# Allegro board motherboard.brd
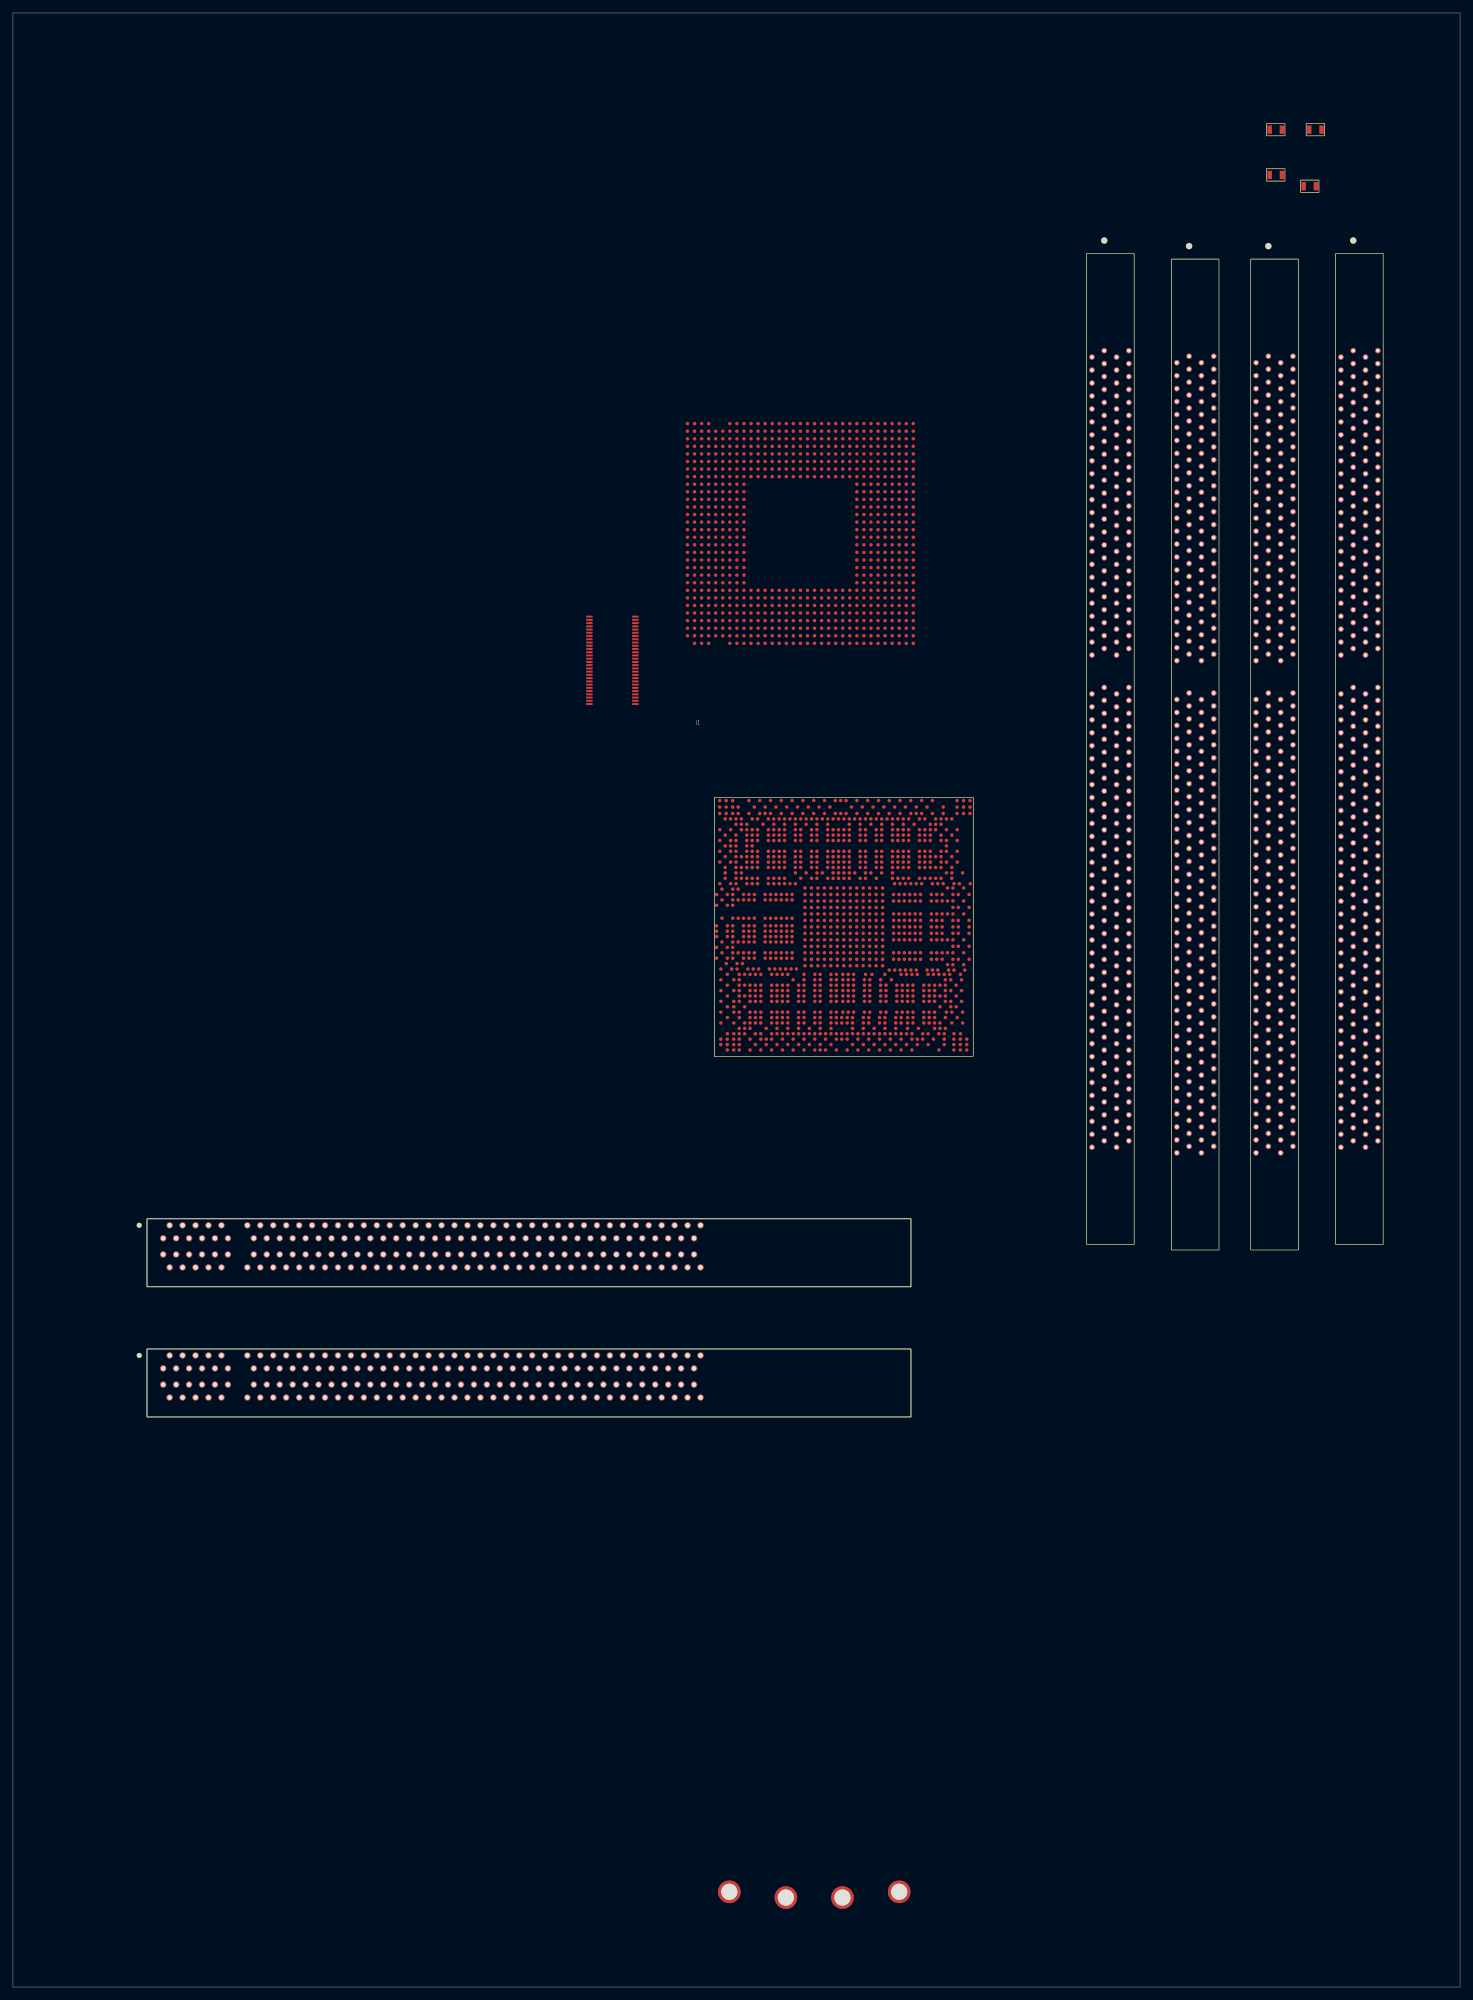
[diagram p0: board, top side]
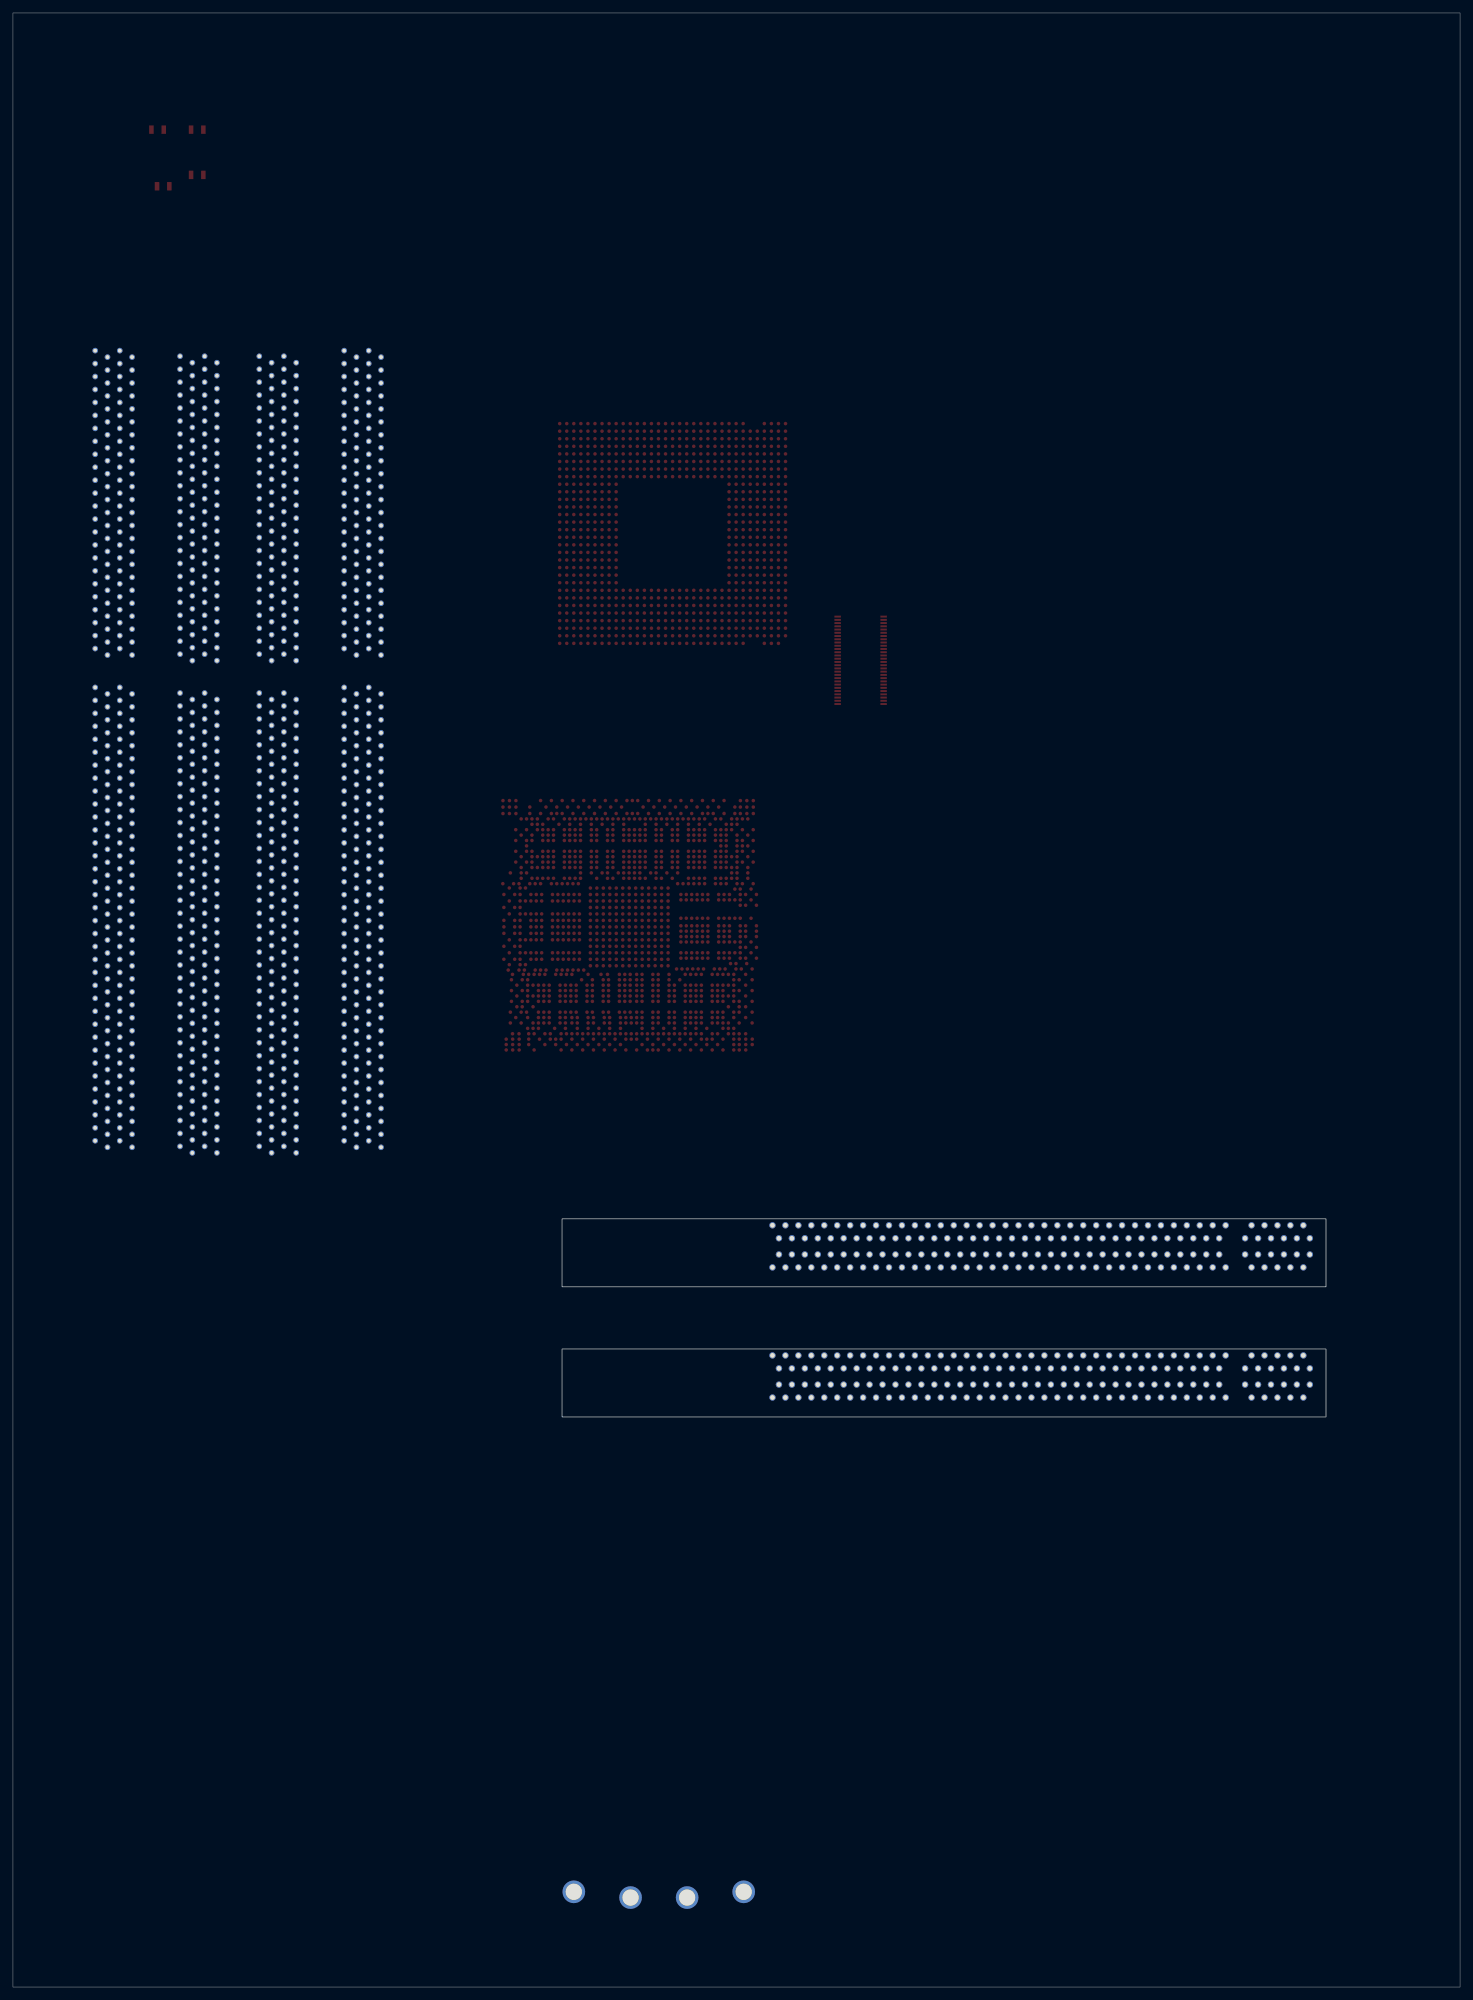
[diagram p1: board, bottom side, seen from below]

Outline 223.52 x 304.8 mm; copper layers: TOP, BOTTOM. Coordinates in mm from the lower left corner of the outline.
Outline path: 0,304.8 223.52,304.8 223.52,0 0,0 0,304.8

## Placement (name value [footprint] x y rotation side)
J1  Socket 775  [INTEL_SOCKET_775_REV2]  104.19 207.47 0 top
J2  DDR3 Socket  [MOLEX_DDR3_SOCKET_78315-0201]  -1.98 408.66 270 top
J3  DDR3 Socket  [MOLEX_DDR3_SOCKET_78315-0201]  -15.09 407.8 270 top
J4  DDR3 Socket  [MOLEX_DDR3_SOCKET_78315-0201]  -27.33 407.8 270 top
J5  DDR3 Socket  [MOLEX_DDR3_SOCKET_78315-0201]  -40.44 408.66 270 top
J6  PCI Express x16 Socket  [MOLEX_PCI-E_X16_SOCKET_47505]  -118.8 -119.89 0 top
J7  PCI Express x16 Socket  [MOLEX_PCI-E_X16_SOCKET_47505]  -118.8 -139.98 0 top
R1  R_0805  [0805_SMD]  184.61 260.78 0 top
R2  R_0805  [0805_SMD]  184.61 253.8 0 top
R3  R_0805  [0805_SMD]  190.73 260.78 0 top
R4  R_0805  [0805_SMD]  189.87 252.04 0 top
TP1  X48 TP3  [TEST_POINT]  57.89 -9.3 0 top
TP2  X48 TP2  [TEST_POINT]  49.12 -10.19 0 top
TP3  X48 TP1  [TEST_POINT]  40.39 -10.19 0 top
TP4  X48 TP0  [TEST_POINT]  31.65 -9.3 0 top
U1  X48 Express  [INTEL_X48]  108.33 143.69 0 top
U2  Clock CK505  [TSSOP_56]  -119.96 23.6 0 top

## Library data of the parts
J1 = Socket 775
J2-J5 = DDR3 Socket
J6 J7 = PCI Express x16 Slot
R1-R4 = R_0805
TP1-TP4 = TEST POINT
U1 = X48 Express Northbridge
U2 = Clock CK505

## Footprints (pads in the part's own frame, mm; a bottom-side part is the same pattern mirrored in y, then rotated)
0805_SMD
  rect 0.7x1.3 smd: 1(11.4,26) 2(9.5,26)
INTEL_SOCKET_775_REV2
  round 0.55 smd: A2(0,1.17) A3(0,2.34) A4(0,3.51) A5(0,4.68) A6(0,5.85) A7(0,7.02) A8(0,8.19) A9(0,9.36) A10(0,10.53) A11(0,11.7) A12(0,12.87) A13(0,14.04) A14(0,15.21) A15(0,16.38) A16(0,17.55) A17(0,18.72) A18(0,19.89) A19(0,21.06) A20(0,22.23) A21(0,23.4) A22(0,24.57) A23(0,25.74) A24(0,26.91) A25(0,28.08) A26(0,29.25) A27(0,30.42) A28(0,31.59) A29(0,32.76) A30(0,33.93) AA1(21.8,0) AA2(21.8,1.17) AA3(21.8,2.34) AA4(21.8,3.51) AA5(21.8,4.68) AA6(21.8,5.85) AA7(21.8,7.02) AA8(21.8,8.19) AA23(21.8,25.74) AA24(21.8,26.91) AA25(21.8,28.08) AA26(21.8,29.25) AA27(21.8,30.42) AA28(21.8,31.59) AA29(21.8,32.76) AA30(21.8,33.93) AB1(22.89,0) AB2(22.89,1.17) AB3(22.89,2.34) AB4(22.89,3.51) AB5(22.89,4.68) AB6(22.89,5.85) AB7(22.89,7.02) AB8(22.89,8.19) AB23(22.89,25.74) AB24(22.89,26.91) AB25(22.89,28.08) AB26(22.89,29.25) AB27(22.89,30.42) AB28(22.89,31.59) AB29(22.89,32.76) AB30(22.89,33.93) AC1(23.98,0) AC2(23.98,1.17) AC3(23.98,2.34) AC4(23.98,3.51) AC5(23.98,4.68) AC6(23.98,5.85) AC7(23.98,7.02) AC8(23.98,8.19) AC23(23.98,25.74) AC24(23.98,26.91) AC25(23.98,28.08) AC26(23.98,29.25) AC27(23.98,30.42) AC28(23.98,31.59) AC29(23.98,32.76) AC30(23.98,33.93) AD1(25.07,0) AD2(25.07,1.17) AD3(25.07,2.34) AD4(25.07,3.51) AD5(25.07,4.68) AD6(25.07,5.85) AD7(25.07,7.02) AD8(25.07,8.19) AD23(25.07,25.74) AD24(25.07,26.91) AD25(25.07,28.08) AD26(25.07,29.25) AD27(25.07,30.42) AD28(25.07,31.59) AD29(25.07,32.76) AD30(25.07,33.93) AE1(26.16,0) AE2(26.16,1.17) AE3(26.16,2.34) AE4(26.16,3.51) AE5(26.16,4.68) AE6(26.16,5.85) AE7(26.16,7.02) AE8(26.16,8.19) AE9(26.16,9.36) AE10(26.16,10.53) AE11(26.16,11.7) AE12(26.16,12.87) AE13(26.16,14.04) AE14(26.16,15.21) AE15(26.16,16.38) AE16(26.16,17.55) AE17(26.16,18.72) AE18(26.16,19.89) AE19(26.16,21.06) AE20(26.16,22.23) AE21(26.16,23.4) AE22(26.16,24.57) AE23(26.16,25.74) AE24(26.16,26.91) AE25(26.16,28.08) AE26(26.16,29.25) AE27(26.16,30.42) AE28(26.16,31.59) AE29(26.16,32.76) AE30(26.16,33.93) AF1(27.25,0) AF2(27.25,1.17) AF3(27.25,2.34) AF4(27.25,3.51) AF5(27.25,4.68) AF6(27.25,5.85) AF7(27.25,7.02) AF8(27.25,8.19) AF9(27.25,9.36) AF10(27.25,10.53) AF11(27.25,11.7) AF12(27.25,12.87) AF13(27.25,14.04) AF14(27.25,15.21) AF15(27.25,16.38) AF16(27.25,17.55) AF17(27.25,18.72) AF18(27.25,19.89) AF19(27.25,21.06) AF20(27.25,22.23) AF21(27.25,23.4) AF22(27.25,24.57) AF23(27.25,25.74) AF24(27.25,26.91) AF25(27.25,28.08) AF26(27.25,29.25) AF27(27.25,30.42) AF28(27.25,31.59) AF29(27.25,32.76) AF30(27.25,33.93) AG1(28.34,0) AG2(28.34,1.17) AG3(28.34,2.34) AG4(28.34,3.51) AG5(28.34,4.68) AG6(28.34,5.85) AG7(28.34,7.02) AG8(28.34,8.19) AG9(28.34,9.36) AG10(28.34,10.53) AG11(28.34,11.7) AG12(28.34,12.87) AG13(28.34,14.04) AG14(28.34,15.21) AG15(28.34,16.38) AG16(28.34,17.55) AG17(28.34,18.72) AG18(28.34,19.89) AG19(28.34,21.06) AG20(28.34,22.23) AG21(28.34,23.4) AG22(28.34,24.57) AG23(28.34,25.74) AG24(28.34,26.91) AG25(28.34,28.08) AG26(28.34,29.25) AG27(28.34,30.42) AG28(28.34,31.59) AG29(28.34,32.76) AG30(28.34,33.93) AH1(29.43,0) AH2(29.43,1.17) AH3(29.43,2.34) AH4(29.43,3.51) AH5(29.43,4.68) AH6(29.43,5.85) AH7(29.43,7.02) AH8(29.43,8.19) AH9(29.43,9.36) AH10(29.43,10.53) AH11(29.43,11.7) AH12(29.43,12.87) AH13(29.43,14.04) AH14(29.43,15.21) AH15(29.43,16.38) AH16(29.43,17.55) AH17(29.43,18.72) AH18(29.43,19.89) AH19(29.43,21.06) AH20(29.43,22.23) AH21(29.43,23.4) AH22(29.43,24.57) AH23(29.43,25.74) AH24(29.43,26.91) AH25(29.43,28.08) AH26(29.43,29.25) AH27(29.43,30.42) AH28(29.43,31.59) AH29(29.43,32.76) AH30(29.43,33.93) AJ1(30.52,0) AJ2(30.52,1.17) AJ3(30.52,2.34) AJ4(30.52,3.51) AJ5(30.52,4.68) AJ6(30.52,5.85) AJ7(30.52,7.02) AJ8(30.52,8.19) AJ9(30.52,9.36) AJ10(30.52,10.53) AJ11(30.52,11.7) AJ12(30.52,12.87) AJ13(30.52,14.04) AJ14(30.52,15.21) AJ15(30.52,16.38) AJ16(30.52,17.55) AJ17(30.52,18.72) AJ18(30.52,19.89) AJ19(30.52,21.06) AJ20(30.52,22.23) AJ21(30.52,23.4) AJ22(30.52,24.57) AJ23(30.52,25.74) AJ24(30.52,26.91) AJ25(30.52,28.08) AJ26(30.52,29.25) AJ27(30.52,30.42) AJ28(30.52,31.59) AJ29(30.52,32.76) AJ30(30.52,33.93) AK1(31.61,0) AK2(31.61,1.17) AK3(31.61,2.34) AK4(31.61,3.51) AK5(31.61,4.68) AK6(31.61,5.85) AK7(31.61,7.02) AK8(31.61,8.19) AK9(31.61,9.36) AK10(31.61,10.53) AK11(31.61,11.7) AK12(31.61,12.87) AK13(31.61,14.04) AK14(31.61,15.21) AK15(31.61,16.38) AK16(31.61,17.55) AK17(31.61,18.72) AK18(31.61,19.89) AK19(31.61,21.06) AK20(31.61,22.23) AK21(31.61,23.4) AK22(31.61,24.57) AK23(31.61,25.74) AK24(31.61,26.91) AK25(31.61,28.08) AK26(31.61,29.25) AK27(31.61,30.42) AK28(31.61,31.59) AK29(31.61,32.76) AK30(31.61,33.93) AL1(32.7,0) AL2(32.7,1.17) AL3(32.7,2.34) AL4(32.7,3.51) AL5(32.7,4.68) AL6(32.7,5.85) AL7(32.7,7.02) AL8(32.7,8.19) AL9(32.7,9.36) AL10(32.7,10.53) AL11(32.7,11.7) AL12(32.7,12.87) AL13(32.7,14.04) AL14(32.7,15.21) AL15(32.7,16.38) AL16(32.7,17.55) AL17(32.7,18.72) AL18(32.7,19.89) AL19(32.7,21.06) AL20(32.7,22.23) AL21(32.7,23.4) AL22(32.7,24.57) AL23(32.7,25.74) AL24(32.7,26.91) AL25(32.7,28.08) AL26(32.7,29.25) AL27(32.7,30.42) AL28(32.7,31.59) AL29(32.7,32.76) AL30(32.7,33.93) AM1(33.79,0) AM2(33.79,1.17) AM3(33.79,2.34) AM4(33.79,3.51) AM5(33.79,4.68) AM6(33.79,5.85) AM7(33.79,7.02) AM8(33.79,8.19) AM9(33.79,9.36) AM10(33.79,10.53) AM11(33.79,11.7) AM12(33.79,12.87) AM13(33.79,14.04) AM14(33.79,15.21) AM15(33.79,16.38) AM16(33.79,17.55) AM17(33.79,18.72) AM18(33.79,19.89) AM19(33.79,21.06) AM20(33.79,22.23) AM21(33.79,23.4) AM22(33.79,24.57) AM23(33.79,25.74) AM24(33.79,26.91) AM25(33.79,28.08) AM26(33.79,29.25) AM27(33.79,30.42) AM28(33.79,31.59) AM29(33.79,32.76) AM30(33.79,33.93) AN1(34.88,0) AN2(34.88,1.17) AN3(34.88,2.34) AN4(34.88,3.51) AN5(34.88,4.68) AN6(34.88,5.85) AN7(34.88,7.02) AN8(34.88,8.19) AN9(34.88,9.36) AN10(34.88,10.53) AN11(34.88,11.7) AN12(34.88,12.87) AN13(34.88,14.04) AN14(34.88,15.21) AN15(34.88,16.38) AN16(34.88,17.55) AN17(34.88,18.72) AN18(34.88,19.89) AN19(34.88,21.06) AN20(34.88,22.23) AN21(34.88,23.4) AN22(34.88,24.57) AN23(34.88,25.74) AN24(34.88,26.91) AN25(34.88,28.08) AN26(34.88,29.25) AN27(34.88,30.42) AN28(34.88,31.59) AN29(34.88,32.76) AN30(34.88,33.93) B1(1.09,0) B2(1.09,1.17) B3(1.09,2.34) B4(1.09,3.51) B5(1.09,4.68) B6(1.09,5.85) B7(1.09,7.02) B8(1.09,8.19) B9(1.09,9.36) B10(1.09,10.53) B11(1.09,11.7) B12(1.09,12.87) B13(1.09,14.04) B14(1.09,15.21) B15(1.09,16.38) B16(1.09,17.55) B17(1.09,18.72) B18(1.09,19.89) B19(1.09,21.06) B20(1.09,22.23) B21(1.09,23.4) B22(1.09,24.57) B23(1.09,25.74) B24(1.09,26.91) B25(1.09,28.08) B26(1.09,29.25) B27(1.09,30.42) B28(1.09,31.59) B29(1.09,32.76) B30(1.09,33.93) C1(2.18,0) C2(2.18,1.17) C3(2.18,2.34) C4(2.18,3.51) C5(2.18,4.68) C6(2.18,5.85) C7(2.18,7.02) C8(2.18,8.19) C9(2.18,9.36) C10(2.18,10.53) C11(2.18,11.7) C12(2.18,12.87) C13(2.18,14.04) C14(2.18,15.21) C15(2.18,16.38) C16(2.18,17.55) C17(2.18,18.72) C18(2.18,19.89) C19(2.18,21.06) C20(2.18,22.23) C21(2.18,23.4) C22(2.18,24.57) C23(2.18,25.74) C24(2.18,26.91) C25(2.18,28.08) C26(2.18,29.25) C27(2.18,30.42) C28(2.18,31.59) C29(2.18,32.76) C30(2.18,33.93) D1(3.27,0) D2(3.27,1.17) D3(3.27,2.34) D4(3.27,3.51) D5(3.27,4.68) D6(3.27,5.85) D7(3.27,7.02) D8(3.27,8.19) D9(3.27,9.36) D10(3.27,10.53) D11(3.27,11.7) D12(3.27,12.87) D13(3.27,14.04) D14(3.27,15.21) D15(3.27,16.38) D16(3.27,17.55) D17(3.27,18.72) D18(3.27,19.89) D19(3.27,21.06) D20(3.27,22.23) D21(3.27,23.4) D22(3.27,24.57) D23(3.27,25.74) D24(3.27,26.91) D25(3.27,28.08) D26(3.27,29.25) D27(3.27,30.42) D28(3.27,31.59) D29(3.27,32.76) D30(3.27,33.93) E2(4.36,1.17) E3(4.36,2.34) E4(4.36,3.51) E5(4.36,4.68) E6(4.36,5.85) E7(4.36,7.02) E8(4.36,8.19) E9(4.36,9.36) E10(4.36,10.53) E11(4.36,11.7) E12(4.36,12.87) E13(4.36,14.04) E14(4.36,15.21) E15(4.36,16.38) E16(4.36,17.55) E17(4.36,18.72) E18(4.36,19.89) E19(4.36,21.06) E20(4.36,22.23) E21(4.36,23.4) E22(4.36,24.57) E23(4.36,25.74) E24(4.36,26.91) E25(4.36,28.08) E26(4.36,29.25) E27(4.36,30.42) E28(4.36,31.59) E29(4.36,32.76) F2(5.45,1.17) F3(5.45,2.34) F4(5.45,3.51) F5(5.45,4.68) F6(5.45,5.85) F7(5.45,7.02) F8(5.45,8.19) F9(5.45,9.36) F10(5.45,10.53) F11(5.45,11.7) F12(5.45,12.87) F13(5.45,14.04) F14(5.45,15.21) F15(5.45,16.38) F16(5.45,17.55) F17(5.45,18.72) F18(5.45,19.89) F19(5.45,21.06) F20(5.45,22.23) F21(5.45,23.4) F22(5.45,24.57) F23(5.45,25.74) F24(5.45,26.91) F25(5.45,28.08) F26(5.45,29.25) F27(5.45,30.42) F28(5.45,31.59) F29(5.45,32.76) G1(6.54,0) G2(6.54,1.17) G3(6.54,2.34) G4(6.54,3.51) G5(6.54,4.68) G6(6.54,5.85) G7(6.54,7.02) G8(6.54,8.19) G9(6.54,9.36) G10(6.54,10.53) G11(6.54,11.7) G12(6.54,12.87) G13(6.54,14.04) G14(6.54,15.21) G15(6.54,16.38) G16(6.54,17.55) G17(6.54,18.72) G18(6.54,19.89) G19(6.54,21.06) G20(6.54,22.23) G21(6.54,23.4) G22(6.54,24.57) G23(6.54,25.74) G24(6.54,26.91) G25(6.54,28.08) G26(6.54,29.25) G27(6.54,30.42) G28(6.54,31.59) G29(6.54,32.76) G30(6.54,33.93) H1(7.63,0) H2(7.63,1.17) H3(7.63,2.34) H4(7.63,3.51) H5(7.63,4.68) H6(7.63,5.85) H7(7.63,7.02) H8(7.63,8.19) H9(7.63,9.36) H10(7.63,10.53) H11(7.63,11.7) H12(7.63,12.87) H13(7.63,14.04) H14(7.63,15.21) H15(7.63,16.38) H16(7.63,17.55) H17(7.63,18.72) H18(7.63,19.89) H19(7.63,21.06) H20(7.63,22.23) H21(7.63,23.4) H22(7.63,24.57) H23(7.63,25.74) H24(7.63,26.91) H25(7.63,28.08) H26(7.63,29.25) H27(7.63,30.42) H28(7.63,31.59) H29(7.63,32.76) H30(7.63,33.93) J1(8.72,0) J2(8.72,1.17) J3(8.72,2.34) J4(8.72,3.51) J5(8.72,4.68) J6(8.72,5.85) J7(8.72,7.02) J8(8.72,8.19) J9(8.72,9.36) J10(8.72,10.53) J11(8.72,11.7) J12(8.72,12.87) J13(8.72,14.04) J14(8.72,15.21) J15(8.72,16.38) J16(8.72,17.55) J17(8.72,18.72) J18(8.72,19.89) J19(8.72,21.06) J20(8.72,22.23) J21(8.72,23.4) J22(8.72,24.57) J23(8.72,25.74) J24(8.72,26.91) J25(8.72,28.08) J26(8.72,29.25) J27(8.72,30.42) J28(8.72,31.59) J29(8.72,32.76) J30(8.72,33.93) K1(9.81,0) K2(9.81,1.17) K3(9.81,2.34) K4(9.81,3.51) K5(9.81,4.68) K6(9.81,5.85) K7(9.81,7.02) K8(9.81,8.19) K23(9.81,25.74) K24(9.81,26.91) K25(9.81,28.08) K26(9.81,29.25) K27(9.81,30.42) K28(9.81,31.59) K29(9.81,32.76) K30(9.81,33.93) L1(10.9,0) L2(10.9,1.17) L3(10.9,2.34) L4(10.9,3.51) L5(10.9,4.68) L6(10.9,5.85) L7(10.9,7.02) L8(10.9,8.19) L23(10.9,25.74) L24(10.9,26.91) L25(10.9,28.08) L26(10.9,29.25) L27(10.9,30.42) L28(10.9,31.59) L29(10.9,32.76) L30(10.9,33.93) M1(11.99,0) M2(11.99,1.17) M3(11.99,2.34) M4(11.99,3.51) M5(11.99,4.68) M6(11.99,5.85) M7(11.99,7.02) M8(11.99,8.19) M23(11.99,25.74) M24(11.99,26.91) M25(11.99,28.08) M26(11.99,29.25) M27(11.99,30.42) M28(11.99,31.59) M29(11.99,32.76) M30(11.99,33.93) N1(13.08,0) N2(13.08,1.17) N3(13.08,2.34) N4(13.08,3.51) N5(13.08,4.68) N6(13.08,5.85) N7(13.08,7.02) N8(13.08,8.19) N23(13.08,25.74) N24(13.08,26.91) N25(13.08,28.08) N26(13.08,29.25) N27(13.08,30.42) N28(13.08,31.59) N29(13.08,32.76) N30(13.08,33.93) P1(14.17,0) P2(14.17,1.17) P3(14.17,2.34) P4(14.17,3.51) P5(14.17,4.68) P6(14.17,5.85) P7(14.17,7.02) P8(14.17,8.19) P23(14.17,25.74) P24(14.17,26.91) P25(14.17,28.08) P26(14.17,29.25) P27(14.17,30.42) P28(14.17,31.59) P29(14.17,32.76) P30(14.17,33.93) R1(15.26,0) R2(15.26,1.17) R3(15.26,2.34) R4(15.26,3.51) R5(15.26,4.68) R6(15.26,5.85) R7(15.26,7.02) R8(15.26,8.19) R23(15.26,25.74) R24(15.26,26.91) R25(15.26,28.08) R26(15.26,29.25) R27(15.26,30.42) R28(15.26,31.59) R29(15.26,32.76) R30(15.26,33.93) T1(16.35,0) T2(16.35,1.17) T3(16.35,2.34) T4(16.35,3.51) T5(16.35,4.68) T6(16.35,5.85) T7(16.35,7.02) T8(16.35,8.19) T23(16.35,25.74) T24(16.35,26.91) T25(16.35,28.08) T26(16.35,29.25) T27(16.35,30.42) T28(16.35,31.59) T29(16.35,32.76) T30(16.35,33.93) U1(17.44,0) U2(17.44,1.17) U3(17.44,2.34) U4(17.44,3.51) U5(17.44,4.68) U6(17.44,5.85) U7(17.44,7.02) U8(17.44,8.19) U23(17.44,25.74) U24(17.44,26.91) U25(17.44,28.08) U26(17.44,29.25) U27(17.44,30.42) U28(17.44,31.59) U29(17.44,32.76) U30(17.44,33.93) V1(18.53,0) V2(18.53,1.17) V3(18.53,2.34) V4(18.53,3.51) V5(18.53,4.68) V6(18.53,5.85) V7(18.53,7.02) V8(18.53,8.19) V23(18.53,25.74) V24(18.53,26.91) V25(18.53,28.08) V26(18.53,29.25) V27(18.53,30.42) V28(18.53,31.59) V29(18.53,32.76) V30(18.53,33.93) W1(19.62,0) W2(19.62,1.17) W3(19.62,2.34) W4(19.62,3.51) W5(19.62,4.68) W6(19.62,5.85) W7(19.62,7.02) W8(19.62,8.19) W23(19.62,25.74) W24(19.62,26.91) W25(19.62,28.08) W26(19.62,29.25) W27(19.62,30.42) W28(19.62,31.59) W29(19.62,32.76) W30(19.62,33.93) Y1(20.71,0) Y2(20.71,1.17) Y3(20.71,2.34) Y4(20.71,3.51) Y5(20.71,4.68) Y6(20.71,5.85) Y7(20.71,7.02) Y8(20.71,8.19) Y23(20.71,25.74) Y24(20.71,26.91) Y25(20.71,28.08) Y26(20.71,29.25) Y27(20.71,30.42) Y28(20.71,31.59) Y29(20.71,32.76) Y30(20.71,33.93)
INTEL_X48
  round 0.55 smd: A2(2,1) A3(3,1) A6(34.69,1) A8(3.851,1) A10(5.518,1) A12(7.185,1) A14(8.852,1) A16(10.519,1) A18(12.186,1) A20(13.853,1) A22(15.52,1) A23(16.353,1) A24(17.187,1) A26(18.854,1) A28(20.521,1) A30(22.188,1) A32(23.855,1) A34(25.522,1) A36(27.189,1) A38(28.856,1) A40(30.523,1) A43(37,1) A44(38,1) A45(39,1) AA2(1.183,17.67) AA4(2.85,17.67) AA5(3.684,17.67) AA6(4.517,17.67) AA7(5.351,17.67) AA8(6.184,17.67) AA10(7.851,17.67) AA11(8.685,17.67) AA12(9.518,17.67) AA13(10.352,17.67) AA14(11.185,17.67) AA15(12.019,17.67) AA17(14,18) AA18(15,18) AA19(16,18) AA20(17,18) AA21(18,18) AA22(19,18) AA23(20,18) AA24(21,18) AA25(22,18) AA26(23,18) AA27(24,18) AA28(25,18) AA29(26,18) AA31(27.689,18.004) AA32(28.522,18.004) AA33(29.356,18.004) AA34(30.189,18.004) AA35(31.023,18.004) AA36(31.856,18.004) AA38(33.523,18.004) AA39(34.357,18.004) AA40(35.19,18.004) AA41(36.024,18.004) AA42(36.857,18.004) AA44(38.524,18.004) AB1(0.35,18.504) AB3(2.017,18.504) AB4(2.85,18.504) AB6(4.517,18.504) AB7(5.351,18.504) AB8(6.184,18.504) AB10(7.851,18.504) AB11(8.685,18.504) AB12(9.518,18.504) AB13(10.352,18.504) AB14(11.185,18.504) AB15(12.019,18.504) AB17(14,19) AB18(15,19) AB19(16,19) AB20(17,19) AB21(18,19) AB22(19,19) AB23(20,19) AB24(21,19) AB25(22,19) AB26(23,19) AB27(24,19) AB28(25,19) AB29(26,19) AB31(27.689,19.004) AB32(28.522,19.004) AB33(29.356,19.004) AB34(30.189,19.004) AB35(31.023,19.004) AB36(31.856,19.004) AB38(33.523,19.004) AB39(34.357,19.004) AB40(35.19,19.004) AB42(36.857,19.004) AB43(37.691,19.004) AB45(39.358,19.004) AC1(0.35,19.337) AC3(2.017,19.337) AC4(2.85,19.337) AC6(4.517,19.337) AC7(5.351,19.337) AC8(6.184,19.337) AC10(7.851,19.337) AC11(8.685,19.337) AC12(9.518,19.337) AC13(10.352,19.337) AC14(11.185,19.337) AC15(12.019,19.337) AC17(14,20) AC18(15,20) AC19(16,20) AC20(17,20) AC21(18,20) AC22(19,20) AC23(20,20) AC24(21,20) AC25(22,20) AC26(23,20) AC27(24,20) AC28(25,20) AC29(26,20) AC31(27.689,20.004) AC32(28.522,20.004) AC33(29.356,20.004) AC34(30.189,20.004) AC35(31.023,20.004) AC36(31.856,20.004) AC38(33.523,20.004) AC39(34.357,20.004) AC40(35.19,20.004) AC42(36.857,20.004) AC43(37.691,20.004) AC45(39.358,20.004) AD1(0.35,20.171) AD3(2.017,20.171) AD4(2.85,20.171) AD6(4.517,20.171) AD7(5.351,20.171) AD8(6.184,20.171) AD10(7.851,20.171) AD11(8.685,20.171) AD12(9.518,20.171) AD13(10.352,20.171) AD14(11.185,20.171) AD15(12.019,20.171) AD17(14,21) AD18(15,21) AD19(16,21) AD20(17,21) AD21(18,21) AD22(19,21) AD23(20,21) AD24(21,21) AD25(22,21) AD26(23,21) AD27(24,21) AD28(25,21) AD29(26,21) AD31(27.689,21.004) AD32(28.522,21.004) AD33(29.356,21.004) AD34(30.189,21.004) AD35(31.023,21.004) AD36(31.856,21.004) AD38(33.523,21.004) AD39(34.357,21.004) AD40(35.19,21.004) AD42(36.857,21.004) AD43(37.691,21.004) AD45(39.358,21.004) AE2(1.183,21.338) AE4(2.85,21.338) AE5(3.684,21.338) AE6(4.517,21.338) AE7(5.351,21.338) AE8(6.184,21.338) AE10(7.851,21.338) AE11(8.685,21.338) AE12(9.518,21.338) AE13(10.352,21.338) AE14(11.185,21.338) AE15(12.019,21.338) AE17(14,22) AE18(15,22) AE19(16,22) AE20(17,22) AE21(18,22) AE22(19,22) AE23(20,22) AE24(21,22) AE25(22,22) AE26(23,22) AE27(24,22) AE28(25,22) AE29(26,22) AE31(27.689,22.004) AE32(28.522,22.004) AE33(29.356,22.004) AE34(30.189,22.004) AE35(31.023,22.004) AE36(31.856,22.004) AE38(33.523,22.004) AE39(34.357,22.004) AE40(35.19,22.004) AE41(36.024,22.004) AE42(36.857,22.004) AE44(38.524,22.004) AF1(0.35,23.338) AF3(2.017,23.338) AF4(2.85,23.338) AF17(14,23) AF18(15,23) AF19(16,23) AF20(17,23) AF21(18,23) AF22(19,23) AF23(20,23) AF24(21,23) AF25(22,23) AF26(23,23) AF27(24,23) AF28(25,23) AF29(26,23) AF42(36.857,23.005) AF43(37.691,23.005) AF45(39.358,23.005) AG2(1.183,24.171) AG4(2.85,24.171) AG5(3.684,24.171) AG6(4.517,24.171) AG7(5.351,24.171) AG8(6.184,24.171) AG10(7.851,24.171) AG11(8.685,24.171) AG12(9.518,24.171) AG13(10.352,24.171) AG14(11.185,24.171) AG15(12.019,24.171) AG17(14,24) AG18(15,24) AG19(16,24) AG20(17,24) AG21(18,24) AG22(19,24) AG23(20,24) AG24(21,24) AG25(22,24) AG26(23,24) AG27(24,24) AG28(25,24) AG29(26,24) AG31(27.689,24.005) AG32(28.522,24.005) AG33(29.356,24.005) AG34(30.189,24.005) AG35(31.023,24.005) AG36(31.856,24.005) AG38(33.523,24.005) AG39(34.357,24.005) AG40(35.19,24.005) AG41(36.024,24.005) AG42(36.857,24.005) AG44(38.524,24.005) AH1(0.35,25.005) AH3(2.017,25.005) AH4(2.85,25.005) AH6(4.517,25.005) AH7(5.351,25.005) AH8(6.184,25.005) AH10(7.851,25.005) AH11(8.685,25.005) AH12(9.518,25.005) AH13(10.352,25.005) AH14(11.185,25.005) AH15(12.019,25.005) AH17(14,25) AH18(15,25) AH19(16,25) AH20(17,25) AH21(18,25) AH22(19,25) AH23(20,25) AH24(21,25) AH25(22,25) AH26(23,25) AH27(24,25) AH28(25,25) AH29(26,25) AH31(27.689,25.005) AH32(28.522,25.005) AH33(29.356,25.005) AH34(30.189,25.005) AH35(31.023,25.005) AH36(31.856,25.005) AH38(33.523,25.005) AH39(34.357,25.005) AH40(35.19,25.005) AH42(36.857,25.005) AH43(37.691,25.005) AH45(39.358,25.005) AJ2(1.183,25.838) AJ4(2.85,25.838) AJ5(3.684,25.838) AJ17(14,26) AJ18(15,26) AJ19(16,26) AJ20(17,26) AJ21(18,26) AJ22(19,26) AJ23(20,26) AJ24(21,26) AJ25(22,26) AJ26(23,26) AJ27(24,26) AJ28(25,26) AJ29(26,26) AJ41(36.024,26.005) AJ42(36.857,26.005) AJ44(38.524,26.005) AK1(0.85,26.672) AK3(2.517,26.672) AK4(3.351,26.672) AK6(5.018,26.672) AK7(5.851,26.672) AK8(6.685,26.672) AK10(8.352,26.672) AK11(9.185,26.672) AK12(10.019,26.672) AK13(10.852,26.672) AK14(11.686,26.672) AK15(12.519,26.672) AK31(27.855,26.672) AK32(28.689,26.672) AK33(29.522,26.672) AK34(30.356,26.672) AK35(31.189,26.672) AK36(32.023,26.672) AK38(33.69,26.672) AK39(34.523,26.672) AK40(35.357,26.672) AK42(37.024,26.672) AK43(37.857,26.672) AK45(39.524,26.672) AL2(1.684,27.505) AL4(3.351,27.505) AL5(4.184,27.505) AL6(5.018,27.505) AL7(5.851,27.505) AL8(6.685,27.505) AL10(8.352,27.505) AL11(9.185,27.505) AL12(10.019,27.505) AL13(10.852,27.505) AL16(13.353,27.505) AL18(15.02,27.505) AL19(15.853,27.505) AL21(17.52,27.505) AL22(18.354,27.505) AL23(19.187,27.505) AL24(20.021,27.505) AL25(20.854,27.505) AL27(22.521,27.505) AL28(23.355,27.505) AL30(25.022,27.505) AL33(27.522,27.505) AL34(28.356,27.505) AL35(29.189,27.505) AL36(30.023,27.505) AL38(31.69,27.505) AL39(32.523,27.505) AL40(33.357,27.505) AL41(34.19,27.505) AL42(35.024,27.505) AL44(36.691,27.505) AM1(1.684,28.339) AM3(3.351,28.339) AM4(4.184,28.339) AM14(12.519,28.339) AM16(14.186,28.339) AM18(15.853,28.339) AM19(16.687,28.339) AM21(18.354,28.339) AM22(19.187,28.339) AM23(20.021,28.339) AM24(20.854,28.339) AM25(21.688,28.339) AM27(23.355,28.339) AM28(24.188,28.339) AM30(25.855,28.339) AM32(27.522,28.339) AM42(35.857,28.339) AM43(36.691,28.339) AM45(38.358,28.339) AN2(1.684,29.172) AN4(3.351,29.172) AN5(4.184,29.172) AN6(5.018,29.172) AN7(5.851,29.172) AN8(6.685,29.172) AN10(8.352,29.172) AN11(9.185,29.172) AN12(10.019,29.172) AN13(10.852,29.172) AN15(12.519,29.172) AN16(13.353,29.172) AN18(15.02,29.172) AN19(15.853,29.172) AN21(17.52,29.172) AN22(18.354,29.172) AN23(19.187,29.172) AN24(20.021,29.172) AN25(20.854,29.172) AN27(22.521,29.172) AN28(23.355,29.172) AN30(25.022,29.172) AN31(25.855,29.172) AN33(27.522,29.172) AN34(28.356,29.172) AN35(29.189,29.172) AN36(30.023,29.172) AN38(31.69,29.172) AN39(32.523,29.172) AN40(33.357,29.172) AN41(34.19,29.172) AN42(35.024,29.172) AN44(36.691,29.172) AP1(0.85,30.006) AP3(2.517,30.006) AP4(3.351,30.006) AP6(5.018,30.006) AP7(5.851,30.006) AP8(6.685,30.006) AP10(8.352,30.006) AP11(9.185,30.006) AP12(10.019,30.006) AP13(10.852,30.006) AP15(12.519,30.006) AP16(13.353,30.006) AP18(15.02,30.006) AP19(15.853,30.006) AP21(17.52,30.006) AP22(18.354,30.006) AP23(19.187,30.006) AP24(20.021,30.006) AP25(20.854,30.006) AP27(22.521,30.006) AP28(23.355,30.006) AP30(25.022,30.006) AP31(25.855,30.006) AP33(27.522,30.006) AP34(28.356,30.006) AP35(29.189,30.006) AP36(30.023,30.006) AP38(31.69,30.006) AP39(32.523,30.006) AP40(33.357,30.006) AP42(35.024,30.006) AP43(35.857,30.006) AP45(37.524,30.006) AR2(1.684,30.839) AR4(3.351,30.839) AR5(4.184,30.839) AR6(5.018,30.839) AR7(5.851,30.839) AR8(6.685,30.839) AR10(8.352,30.839) AR11(9.185,30.839) AR12(10.019,30.839) AR13(10.852,30.839) AR15(12.519,30.839) AR16(13.353,30.839) AR18(15.02,30.839) AR19(15.853,30.839) AR21(17.52,30.839) AR22(18.354,30.839) AR23(19.187,30.839) AR24(20.021,30.839) AR25(20.854,30.839) AR27(22.521,30.839) AR28(23.355,30.839) AR30(25.022,30.839) AR31(25.855,30.839) AR33(27.522,30.839) AR34(28.356,30.839) AR35(29.189,30.839) AR36(30.023,30.839) AR38(31.69,30.839) AR39(32.523,30.839) AR40(33.357,30.839) AR41(34.19,30.839) AR42(35.024,30.839) AR44(36.691,30.839) AT1(0.85,31.673) AT3(2.517,31.673) AT4(3.351,31.673) AT6(5.018,31.673) AT7(5.851,31.673) AT8(6.685,31.673) AT10(8.352,31.673) AT11(9.185,31.673) AT12(10.019,31.673) AT13(10.852,31.673) AT15(12.519,31.673) AT16(13.353,31.673) AT18(15.02,31.673) AT19(15.853,31.673) AT21(17.52,31.673) AT22(18.354,31.673) AT23(19.187,31.673) AT24(20.021,31.673) AT25(20.854,31.673) AT27(22.521,31.673) AT28(23.355,31.673) AT30(25.022,31.673) AT31(25.855,31.673) AT33(27.522,31.673) AT34(28.356,31.673) AT35(29.189,31.673) AT36(30.023,31.673) AT38(31.69,31.673) AT39(32.523,31.673) AT40(33.357,31.673) AT42(35.024,31.673) AT43(35.857,31.673) AT45(37.524,31.673) AU2(1.684,32.506) AU3(2.517,32.506) AU5(3.351,32.506) AU41(5.018,32.506) AU43(35.857,32.506) AU44(5.851,32.506) AV1(0.85,33.34) AV3(2.517,33.34) AV4(3.351,33.34) AV6(5.018,33.34) AV7(5.851,33.34) AV8(6.685,33.34) AV10(8.352,33.34) AV11(9.185,33.34) AV12(10.019,33.34) AV13(10.852,33.34) AV15(12.519,33.34) AV16(13.353,33.34) AV18(15.02,33.34) AV19(15.853,33.34) AV21(17.52,33.34) AV22(18.354,33.34) AV23(19.187,33.34) AV24(20.021,33.34) AV25(20.854,33.34) AV27(22.521,33.34) AV28(23.355,33.34) AV30(25.022,33.34) AV31(25.855,33.34) AV33(27.522,33.34) AV34(28.356,33.34) AV35(29.189,33.34) AV36(30.023,33.34) AV38(31.69,33.34) AV39(32.523,33.34) AV40(33.357,33.34) AV42(35.024,33.34) AV43(35.857,33.34) AV45(37.524,33.34) AW2(1.684,34.173) AW4(3.351,34.173) AW6(5.018,34.173) AW7(5.851,34.173) AW8(6.685,34.173) AW10(8.352,34.173) AW11(9.185,34.173) AW12(10.019,34.173) AW13(10.852,34.173) AW15(12.519,34.173) AW16(13.353,34.173) AW18(15.02,34.173) AW19(15.853,34.173) AW21(17.52,34.173) AW22(18.354,34.173) AW23(19.187,34.173) AW24(20.021,34.173) AW25(20.854,34.173) AW27(22.521,34.173) AW28(23.355,34.173) AW30(25.022,34.173) AW31(25.855,34.173) AW33(27.522,34.173) AW34(28.356,34.173) AW35(29.189,34.173) AW36(30.023,34.173) AW38(31.69,34.173) AW39(32.523,34.173) AW40(33.357,34.173) AW42(35.024,34.173) AW44(36.691,34.173) AY1(0.85,35.007) AY3(2.517,35.007) AY5(4.184,35.007) AY6(5.018,35.007) AY7(5.851,35.007) AY8(6.685,35.007) AY10(8.352,35.007) AY11(9.185,35.007) AY12(10.019,35.007) AY13(10.852,35.007) AY15(12.519,35.007) AY16(13.353,35.007) AY18(15.02,35.007) AY19(15.853,35.007) AY21(17.52,35.007) AY22(18.354,35.007) AY23(19.187,35.007) AY24(20.021,35.007) AY25(20.854,35.007) AY27(22.521,35.007) AY28(23.355,35.007) AY30(25.022,35.007) AY31(25.855,35.007) AY33(27.522,35.007) AY34(28.356,35.007) AY35(29.189,35.007) AY36(30.023,35.007) AY38(31.69,35.007) AY39(32.523,35.007) AY40(33.357,35.007) AY41(34.19,35.007) AY43(35.857,35.007) AY45(37.524,35.007) B1(1,1.833) B2(2,1.833) B3(3,1.833) B4(3.851,1.834) B7(6.351,1.834) B9(8.018,1.834) B11(9.685,1.834) B13(11.352,1.834) B15(13.019,1.834) B17(14.686,1.834) B19(16.353,1.834) B21(18.02,1.834) B25(21.354,1.834) B27(23.021,1.834) B29(24.688,1.834) B31(26.355,1.834) B33(28.022,1.834) B35(29.689,1.834) B37(31.356,1.834) B39(33.023,1.834) B42(35.524,1.834) B43(37,1.833) B44(38,1.833) B45(39,1.833) BA4(3.351,35.84) BA5(4.184,35.84) BA6(5.018,35.84) BA9(7.518,35.84) BA11(9.185,35.84) BA13(10.852,35.84) BA15(12.519,35.84) BA17(14.186,35.84) BA19(15.853,35.84) BA21(17.52,35.84) BA25(20.854,35.84) BA27(22.521,35.84) BA29(24.188,35.84) BA31(25.855,35.84) BA33(27.522,35.84) BA35(29.189,35.84) BA37(30.856,35.84) BA40(33.357,35.84) BA41(34.19,35.84) BA42(35.024,35.84) BB2(1.684,36.674) BB3(2.517,36.674) BB4(3.351,36.674) BB5(4.184,36.674) BB7(5.851,36.674) BB8(6.685,36.674) BB10(8.352,36.674) BB11(9.185,36.674) BB12(10.019,36.674) BB13(10.852,36.674) BB14(11.686,36.674) BB15(12.519,36.674) BB16(13.353,36.674) BB17(14.186,36.674) BB18(15.02,36.674) BB19(15.853,36.674) BB20(16.687,36.674) BB21(17.52,36.674) BB22(18.354,36.674) BB23(19.187,36.674) BB24(20.021,36.674) BB25(20.854,36.674) BB26(21.688,36.674) BB27(22.521,36.674) BB28(23.355,36.674) BB29(24.188,36.674) BB30(25.022,36.674) BB31(25.855,36.674) BB32(26.689,36.674) BB33(27.522,36.674) BB34(28.356,36.674) BB35(29.189,36.674) BB36(30.023,36.674) BB38(31.69,36.674) BB39(32.523,36.674) BB41(34.19,36.674) BB42(35.024,36.674) BB43(35.857,36.674) BB44(36.691,36.674) BC1(0.833,37.5) BC2(1.833,37.5) BC3(2.833,37.5) BC4(3.684,37.507) BC6(5.351,37.507) BC8(7.018,37.507) BC9(7.851,37.507) BC10(8.685,37.507) BC12(10.352,37.507) BC14(12.019,37.507) BC16(13.686,37.507) BC18(15.353,37.507) BC20(17.02,37.507) BC22(18.687,37.507) BC23(19.52,37.507) BC24(20.354,37.507) BC26(22.021,37.507) BC28(23.688,37.507) BC30(25.355,37.507) BC32(27.022,37.507) BC34(28.689,37.507) BC36(30.356,37.507) BC37(31.189,37.507) BC38(32.023,37.507) BC40(33.69,37.507) BC42(35.357,37.507) BC43(37.5,37.5) BC44(38.5,37.5) BC45(39.5,37.5) BD1(0.833,38.5) BD2(1.833,38.5) BD3(2.833,38.5) BD4(3.684,38.508) BD7(6.184,38.508) BD9(7.851,38.508) BD11(9.518,38.508) BD13(11.185,38.508) BD15(12.852,38.508) BD17(14.519,38.508) BD19(16.186,38.508) BD21(17.853,38.508) BD25(21.187,38.508) BD27(22.854,38.508) BD29(24.521,38.508) BD31(26.188,38.508) BD33(27.855,38.508) BD35(29.522,38.508) BD37(31.189,38.508) BD39(32.856,38.508) BD42(35.357,38.508) BD43(37.5,38.5) BD44(38.5,38.5) BD45(39.5,38.5) BE1(0.833,39.5) BE2(1.833,39.5) BE3(2.833,39.5) BE6(5.351,39.508) BE8(7.018,39.508) BE10(8.685,39.508) BE12(10.352,39.508) BE14(12.019,39.508) BE16(13.686,39.508) BE18(15.353,39.508) BE20(17.02,39.508) BE22(18.687,39.508) BE23(19.52,39.508) BE24(20.354,39.508) BE26(22.021,39.508) BE28(23.688,39.508) BE30(25.355,39.508) BE32(27.022,39.508) BE34(28.689,39.508) BE36(30.356,39.508) BE38(32.023,39.508) BE40(33.69,39.508) BE43(37.5,39.5) BE44(38.5,39.5) BE45(39.5,39.5) C1(1,2.666) C2(2,2.666) C3(3,2.666) C4(3.851,2.667) C6(5.518,2.667) C8(7.185,2.667) C9(8.018,2.667) C10(8.852,2.667) C12(10.519,2.667) C14(12.186,2.667) C16(13.853,2.667) C18(15.52,2.667) C20(17.187,2.667) C22(18.854,2.667) C23(19.687,2.667) C24(20.521,2.667) C26(22.188,2.667) C28(23.855,2.667) C30(25.522,2.667) C32(27.189,2.667) C34(28.856,2.667) C36(30.523,2.667) C37(31.356,2.667) C38(32.19,2.667) C40(33.857,2.667) C42(35.524,2.667) C43(37,2.666) C44(38,2.666) C45(39,2.666) D2(2.017,3.501) D3(3.017,3.501) D4(3.851,3.501) D5(4.684,3.501) D7(6.351,3.501) D8(7.185,3.501) D10(8.852,3.501) D11(9.685,3.501) D12(10.519,3.501) D13(11.352,3.501) D14(12.186,3.501) D15(13.019,3.501) D16(13.853,3.501) D17(14.686,3.501) D18(15.52,3.501) D19(16.353,3.501) D20(17.187,3.501) D21(18.02,3.501) D22(18.854,3.501) D23(19.687,3.501) D24(20.521,3.501) D25(21.354,3.501) D26(22.188,3.501) D27(23.021,3.501) D28(23.855,3.501) D29(24.688,3.501) D30(25.522,3.501) D31(26.355,3.501) D32(27.189,3.501) D33(28.022,3.501) D34(28.856,3.501) D35(29.689,3.501) D36(30.523,3.501) D38(32.19,3.501) D39(33.023,3.501) D41(34.69,3.501) D42(35.524,3.501) D43(37.024,3.501) D44(38.024,3.501) E4(3.851,4.334) E5(4.684,4.334) E6(5.518,4.334) E9(8.018,4.334) E11(9.685,4.334) E13(11.352,4.334) E15(13.019,4.334) E17(14.686,4.334) E19(16.353,4.334) E21(18.02,4.334) E25(21.354,4.334) E27(23.021,4.334) E29(24.688,4.334) E31(26.355,4.334) E33(28.022,4.334) E35(29.856,4.334) E37(31.523,4.334) E40(34.023,4.334) E41(34.857,4.334) E42(35.69,4.334) F1(1.017,5.168) F3(3.017,5.168) F5(4.684,5.168) F6(5.518,5.168) F7(6.351,5.168) F8(7.185,5.168) F10(8.852,5.168) F11(9.685,5.168) F12(10.519,5.168) F13(11.352,5.168) F15(13.019,5.168) F16(13.853,5.168) F18(15.52,5.168) F19(16.353,5.168) F21(18.02,5.168) F22(18.854,5.168) F23(19.687,5.168) F24(20.521,5.168) F25(21.354,5.168) F27(23.021,5.168) F28(23.855,5.168) F30(25.522,5.168) F31(26.355,5.168) F33(28.022,5.168) F34(28.856,5.168) F35(29.856,5.168) F36(30.689,5.168) F38(32.356,5.168) F39(33.19,5.168) F40(34.023,5.168) F41(34.857,5.168) F43(36.691,5.168) F45(38.358,5.168) G2(2.017,6.001) G4(3.851,6.001) G6(5.518,6.001) G7(6.351,6.001) G8(7.185,6.001) G10(8.852,6.001) G11(9.685,6.001) G12(10.519,6.001) G13(11.352,6.001) G15(13.019,6.001) G16(13.853,6.001) G18(15.52,6.001) G19(16.353,6.001) G21(18.02,6.001) G22(18.854,6.001) G23(19.687,6.001) G24(20.521,6.001) G25(21.354,6.001) G27(23.021,6.001) G28(23.855,6.001) G30(25.522,6.001) G31(26.355,6.001) G33(28.022,6.001) G34(28.856,6.001) G35(29.856,6.001) G36(30.689,6.001) G38(32.356,6.001) G39(33.19,6.001) G40(34.023,6.001) G42(35.69,6.001) G44(37.524,6.001) H1(1.017,6.835) H3(3.017,6.835) H4(3.851,6.835) H6(5.518,6.835) H7(6.351,6.835) H8(7.185,6.835) H10(8.852,6.835) H11(9.685,6.835) H12(10.519,6.835) H13(11.352,6.835) H15(13.019,6.835) H16(13.853,6.835) H18(15.52,6.835) H19(16.353,6.835) H21(18.02,6.835) H22(18.854,6.835) H23(19.854,6.835) H24(20.687,6.835) H25(21.521,6.835) H27(23.188,6.835) H28(24.021,6.835) H30(25.688,6.835) H31(26.522,6.835) H33(28.189,6.835) H34(29.022,6.835) H35(29.856,6.835) H36(30.689,6.835) H38(32.356,6.835) H39(33.19,6.835) H40(34.023,6.835) H42(35.857,6.835) H43(36.691,6.835) H45(38.358,6.835) J2(2.017,7.668) J3(3.017,7.668) J5(4.684,7.668) J41(34.857,7.668) J43(36.524,7.668) J44(37.357,7.668) K1(1.017,8.502) K3(3.017,8.502) K4(3.851,8.502) K6(5.518,8.502) K7(6.351,8.502) K8(7.185,8.502) K10(8.852,8.502) K11(9.685,8.502) K12(10.519,8.502) K13(11.352,8.502) K15(13.019,8.502) K16(13.853,8.502) K18(15.52,8.502) K19(16.353,8.502) K21(18.02,8.502) K22(18.854,8.502) K23(19.854,8.502) K24(20.687,8.502) K25(21.521,8.502) K27(23.188,8.502) K28(24.021,8.502) K30(25.688,8.502) K31(26.522,8.502) K33(28.189,8.502) K34(29.022,8.502) K35(29.856,8.502) K36(30.689,8.502) K38(32.356,8.502) K39(33.19,8.502) K40(34.023,8.502) K42(35.69,8.502) K43(36.524,8.502) K45(38.191,8.502) L2(2.017,9.335) L4(3.851,9.335) L5(4.684,9.335) L6(5.518,9.335) L7(6.351,9.335) L8(7.185,9.335) L10(8.852,9.335) L11(9.685,9.335) L12(10.519,9.335) L13(11.352,9.335) L15(13.019,9.335) L16(13.853,9.335) L18(15.52,9.335) L19(16.353,9.335) L21(18.02,9.335) L22(18.854,9.335) L23(19.854,9.335) L24(20.687,9.335) L25(21.521,9.335) L27(23.188,9.335) L28(24.021,9.335) L30(25.688,9.335) L31(26.522,9.335) L33(28.189,9.335) L34(29.022,9.335) L35(29.856,9.335) L36(30.689,9.335) L38(32.356,9.335) L39(33.19,9.335) L40(34.023,9.335) L41(34.857,9.335) L42(35.69,9.335) L44(37.357,9.335) M1(1.017,10.169) M3(3.017,10.169) M4(3.851,10.169) M6(5.518,10.169) M7(6.351,10.169) M8(7.185,10.169) M10(8.852,10.169) M11(9.685,10.169) M12(10.519,10.169) M13(11.352,10.169) M15(13.019,10.169) M16(13.853,10.169) M18(15.52,10.169) M19(16.353,10.169) M21(18.02,10.169) M22(18.854,10.169) M23(19.854,10.169) M24(20.687,10.169) M25(21.521,10.169) M27(23.188,10.169) M28(24.021,10.169) M30(25.688,10.169) M31(26.522,10.169) M33(28.189,10.169) M34(29.022,10.169) M35(29.856,10.169) M36(30.689,10.169) M38(32.356,10.169) M39(33.19,10.169) M40(34.023,10.169) M42(35.69,10.169) M43(36.524,10.169) M45(38.191,10.169) N2(2.017,11.002) N4(3.851,11.002) N5(4.684,11.002) N6(5.518,11.002) N7(6.351,11.002) N8(7.185,11.002) N10(8.852,11.002) N11(9.685,11.002) N12(10.519,11.002) N13(11.352,11.002) N15(13.019,11.002) N16(13.853,11.002) N18(15.52,11.002) N19(16.353,11.002) N21(18.02,11.002) N22(18.854,11.002) N23(19.854,11.002) N24(20.687,11.002) N25(21.521,11.002) N27(23.188,11.002) N28(24.021,11.002) N30(25.688,11.002) N31(26.522,11.002) N33(28.189,11.002) N34(29.022,11.002) N35(29.856,11.002) N36(30.689,11.002) N38(32.356,11.002) N39(33.19,11.002) N40(34.023,11.002) N41(34.857,11.002) N42(35.69,11.002) N44(37.357,11.002) P1(1.017,11.836) P3(3.017,11.836) P4(3.851,11.836) P14(12.186,11.836) P16(13.853,11.836) P18(15.52,11.836) P19(16.353,11.836) P21(18.02,11.836) P22(18.854,11.836) P23(19.854,11.836) P24(20.687,11.836) P25(21.521,11.836) P27(23.188,11.836) P28(24.021,11.836) P30(25.688,11.836) P32(27.355,11.836) P42(35.69,11.836) P43(36.524,11.836) P45(38.191,11.836) R2(2.017,12.669) R4(3.851,12.669) R5(4.684,12.669) R6(5.518,12.669) R7(6.351,12.669) R8(7.185,12.669) R10(8.852,12.669) R11(9.685,12.669) R12(10.519,12.669) R13(11.352,12.669) R16(13.853,12.669) R18(15.52,12.669) R19(16.353,12.669) R21(18.02,12.669) R22(18.854,12.669) R23(19.854,12.669) R24(20.687,12.669) R25(21.521,12.669) R27(23.355,12.669) R28(24.355,12.669) R30(26.355,12.669) R33(28.856,12.669) R34(29.689,12.669) R35(30.523,12.669) R36(31.356,12.669) R38(33.023,12.669) R39(33.857,12.669) R40(34.69,12.669) R41(35.524,12.669) R42(36.357,12.669) R44(38.024,12.669) T1(1.017,13.503) T3(2.684,13.503) T4(3.517,13.503) T6(5.184,13.503) T7(6.018,13.503) T8(6.851,13.503) T10(8.518,13.503) T11(9.352,13.503) T12(10.185,13.503) T13(11.019,13.503) T14(11.852,13.503) T15(12.686,13.503) T31(27.022,13.336) T32(27.855,13.336) T33(28.689,13.336) T34(29.522,13.336) T35(30.356,13.336) T36(31.189,13.336) T38(32.856,13.336) T39(33.69,13.336) T40(34.523,13.336) T42(36.19,13.336) T43(37.024,13.336) T45(38.691,13.336) U2(1.85,14.336) U4(3.517,14.336) U5(4.351,14.336) U17(14,14) U18(15,14) U19(16,14) U20(17,14) U21(18,14) U22(19,14) U23(20,14) U24(21,14) U25(22,14) U26(23,14) U27(24,14) U28(25,14) U29(26,14) U41(36.024,14.169) U42(36.857,14.169) U44(38.524,14.169) V1(0.35,15.17) V3(2.017,15.17) V4(2.85,15.17) V6(4.517,15.17) V7(5.351,15.17) V8(6.184,15.17) V10(7.851,15.17) V11(8.685,15.17) V12(9.518,15.17) V13(10.352,15.17) V14(11.185,15.17) V15(12.019,15.17) V17(14,15) V18(15,15) V19(16,15) V20(17,15) V21(18,15) V22(19,15) V23(20,15) V24(21,15) V25(22,15) V26(23,15) V27(24,15) V28(25,15) V29(26,15) V31(27.689,15.003) V32(28.522,15.003) V33(29.356,15.003) V34(30.189,15.003) V35(31.023,15.003) V36(31.856,15.003) V38(33.523,15.003) V39(34.357,15.003) V40(35.19,15.003) V42(36.857,15.003) V43(37.691,15.003) V45(39.358,15.003) W2(1.183,16.003) W4(2.85,16.003) W5(3.684,16.003) W6(4.517,16.003) W7(5.351,16.003) W8(6.184,16.003) W10(7.851,16.003) W11(8.685,16.003) W12(9.518,16.003) W13(10.352,16.003) W14(11.185,16.003) W15(12.019,16.003) W17(14,16) W18(15,16) W19(16,16) W20(17,16) W21(18,16) W22(19,16) W23(20,16) W24(21,16) W25(22,16) W26(23,16) W27(24,16) W28(25,16) W29(26,16) W31(27.689,16.003) W32(28.522,16.003) W33(29.356,16.003) W34(30.189,16.003) W35(31.023,16.003) W36(31.856,16.003) W38(33.523,16.003) W39(34.357,16.003) W40(35.19,16.003) W41(36.024,16.003) W42(36.857,16.003) W44(38.524,16.003) Y1(0.35,16.837) Y3(2.017,16.837) Y4(2.85,16.837) Y17(14,17) Y18(15,17) Y19(16,17) Y20(17,17) Y21(18,17) Y22(19,17) Y23(20,17) Y24(21,17) Y25(22,17) Y26(23,17) Y27(24,17) Y28(25,17) Y29(26,17) Y42(36.857,17.004) Y43(37.691,17.004) Y45(39.358,17.004)
MOLEX_DDR3_SOCKET_78315-0201
  round 0 hole 1.95 unplated: (148.5,209.95)
  round 0.88 hole 0.57: 1(156,209) 2(157,207.1) 3(158,209) 4(159,207.1) 5(160,209) 6(161,207.1) 7(162,209) 8(163,207.1) 9(164,209) 10(165,207.1) 11(166,209) 12(167,207.1) 13(168,209) 14(169,207.1) 15(170,209) 16(171,207.1) 17(172,209) 18(173,207.1) 19(174,209) 20(175,207.1) 21(176,209) 22(177,207.1) 23(178,209) 24(179,207.1) 25(180,209) 26(181,207.1) 27(182,209) 28(183,207.1) 29(184,209) 30(185,207.1) 31(186,209) 32(187,207.1) 33(188,209) 34(189,207.1) 35(190,209) 36(191,207.1) 37(192,209) 38(193,207.1) 39(194,209) 40(195,207.1) 41(196,209) 42(197,207.1) 43(198,209) 44(199,207.1) 45(200,209) 46(201,207.1) 47(202,209) 48(203,207.1) 49(208,209) 50(209,207.1) 51(210,209) 52(211,207.1) 53(212,209) 54(213,207.1) 55(214,209) 56(215,207.1) 57(216,209) 58(217,207.1) 59(218,209) 60(219,207.1) 61(220,209) 62(221,207.1) 63(222,209) 64(223,207.1) 65(224,209) 66(225,207.1) 67(226,209) 68(227,207.1) 69(228,209) 70(229,207.1) 71(230,209) 72(231,207.1) 73(232,209) 74(233,207.1) 75(234,209) 76(235,207.1) 77(236,209) 78(237,207.1) 79(238,209) 80(239,207.1) 81(240,209) 82(241,207.1) 83(242,209) 84(243,207.1) 85(244,209) 86(245,207.1) 87(246,209) 88(247,207.1) 89(248,209) 90(249,207.1) 91(250,209) 92(251,207.1) 93(252,209) 94(253,207.1) 95(254,209) 96(255,207.1) 97(256,209) 98(257,207.1) 99(258,209) 100(259,207.1) 101(260,209) 102(261,207.1) 103(262,209) 104(263,207.1) 105(264,209) 106(265,207.1) 107(266,209) 108(267,207.1) 109(268,209) 110(269,207.1) 111(270,209) 112(271,207.1) 113(272,209) 114(273,207.1) 115(274,209) 116(275,207.1) 117(276,209) 118(277,207.1) 119(278,209) 120(279,207.1) 121(156,212.8) 122(157,210.9) 123(158,212.8) 124(159,210.9) 125(160,212.8) 126(161,210.9) 127(162,212.8) 128(163,210.9) 129(164,212.8) 130(165,210.9) 131(166,212.8) 132(167,210.9) 133(168,212.8) 134(169,210.9) 135(170,212.8) 136(171,210.9) 137(172,212.8) 138(173,210.9) 139(174,212.8) 140(175,210.9) 141(176,212.8) 142(177,210.9) 143(178,212.8) 144(179,210.9) 145(180,212.8) 146(181,210.9) 147(182,212.8) 148(183,210.9) 149(184,212.8) 150(185,210.9) 151(186,212.8) 152(187,210.9) 153(188,212.8) 154(189,210.9) 155(190,212.8) 156(191,210.9) 157(192,212.8) 158(193,210.9) 159(194,212.8) 160(195,210.9) 161(196,212.8) 162(197,210.9) 163(198,212.8) 164(199,210.9) 165(200,212.8) 166(201,210.9) 167(202,212.8) 168(203,210.9) 169(208,212.8) 170(209,210.9) 171(210,212.8) 172(211,210.9) 173(212,212.8) 174(213,210.9) 175(214,212.8) 176(215,210.9) 177(216,212.8) 178(217,210.9) 179(218,212.8) 180(219,210.9) 181(220,212.8) 182(221,210.9) 183(222,212.8) 184(223,210.9) 185(224,212.8) 186(225,210.9) 187(226,212.8) 188(227,210.9) 189(228,212.8) 190(229,210.9) 191(230,212.8) 192(231,210.9) 193(232,212.8) 194(233,210.9) 195(234,212.8) 196(235,210.9) 197(236,212.8) 198(237,210.9) 199(238,212.8) 200(239,210.9) 201(240,212.8) 202(241,210.9) 203(242,212.8) 204(243,210.9) 205(244,212.8) 206(245,210.9) 207(246,212.8) 208(247,210.9) 209(248,212.8) 210(249,210.9) 211(250,212.8) 212(251,210.9) 213(252,212.8) 214(253,210.9) 215(254,212.8) 216(255,210.9) 217(256,212.8) 218(257,210.9) 219(258,212.8) 220(259,210.9) 221(260,212.8) 222(261,210.9) 223(262,212.8) 224(263,210.9) 225(264,212.8) 226(265,210.9) 227(266,212.8) 228(267,210.9) 229(268,212.8) 230(269,210.9) 231(270,212.8) 232(271,210.9) 233(272,212.8) 234(273,210.9) 235(274,212.8) 236(275,210.9) 237(276,212.8) 238(277,210.9) 239(278,212.8) 240(279,210.9)
MOLEX_PCI-E_X16_SOCKET_47505
  round 0 hole 2.35 unplated: (153.65,234.25) (226.2,234.25)
  round 1 hole 0.7: A1(142,235.5) A2(143,237.5) A3(144,235.5) A4(145,237.5) A5(146,235.5) A6(147,237.5) A7(148,235.5) A8(149,237.5) A9(150,235.5) A10(151,237.5) A11(152,235.5) A12(155,237.5) A13(156,235.5) A14(157,237.5) A15(158,235.5) A16(159,237.5) A17(160,235.5) A18(161,237.5) A19(162,235.5) A20(163,237.5) A21(164,235.5) A22(165,237.5) A23(166,235.5) A24(167,237.5) A25(168,235.5) A26(169,237.5) A27(170,235.5) A28(171,237.5) A29(172,235.5) A30(173,237.5) A31(174,235.5) A32(175,237.5) A33(176,235.5) A34(177,237.5) A35(178,235.5) A36(179,237.5) A37(180,235.5) A38(181,237.5) A39(182,235.5) A40(183,237.5) A41(184,235.5) A42(185,237.5) A43(186,235.5) A44(187,237.5) A45(188,235.5) A46(189,237.5) A47(190,235.5) A48(191,237.5) A49(192,235.5) A50(193,237.5) A51(194,235.5) A52(195,237.5) A53(196,235.5) A54(197,237.5) A55(198,235.5) A56(199,237.5) A57(200,235.5) A58(201,237.5) A59(202,235.5) A60(203,237.5) A61(204,235.5) A62(205,237.5) A63(206,235.5) A64(207,237.5) A65(208,235.5) A66(209,237.5) A67(210,235.5) A68(211,237.5) A69(212,235.5) A70(213,237.5) A71(214,235.5) A72(215,237.5) A73(216,235.5) A74(217,237.5) A75(218,235.5) A76(219,237.5) A77(220,235.5) A78(221,237.5) A79(222,235.5) A80(223,237.5) A81(224,235.5) A82(225,237.5) B1(142,233) B2(143,231) B3(144,233) B4(145,231) B5(146,233) B6(147,231) B7(148,233) B8(149,231) B9(150,233) B10(151,231) B11(152,233) B12(155,231) B13(156,233) B14(157,231) B15(158,233) B16(159,231) B17(160,233) B18(161,231) B19(162,233) B20(163,231) B21(164,233) B22(165,231) B23(166,233) B24(167,231) B25(168,233) B26(169,231) B27(170,233) B28(171,231) B29(172,233) B30(173,231) B31(174,233) B32(175,231) B33(176,233) B34(177,231) B35(178,233) B36(179,231) B37(180,233) B38(181,231) B39(182,233) B40(183,231) B41(184,233) B42(185,231) B43(186,233) B44(187,231) B45(188,233) B46(189,231) B47(190,233) B48(191,231) B49(192,233) B50(193,231) B51(194,233) B52(195,231) B53(196,233) B54(197,231) B55(198,233) B56(199,231) B57(200,233) B58(201,231) B59(202,233) B60(203,231) B61(204,233) B62(205,231) B63(206,233) B64(207,231) B65(208,233) B66(209,231) B67(210,233) B68(211,231) B69(212,233) B70(213,231) B71(214,233) B72(215,231) B73(216,233) B74(217,231) B75(218,233) B76(219,231) B77(220,233) B78(221,231) B79(222,233) B80(223,231) B81(224,233) B82(225,231)
TEST_POINT
  round 3.5 hole 2.5: 1(79,24)
TSSOP_56
  rect 1x0.3 smd: 1(209,188) 2(209,187.5) 3(209,187) 4(209,186.5) 5(209,186) 6(209,185.5) 7(209,185) 8(209,184.5) 9(209,184) 10(209,183.5) 11(209,183) 12(209,182.5) 13(209,182) 14(209,181.5) 15(209,181) 16(209,180.5) 17(209,180) 18(209,179.5) 19(209,179) 20(209,178.5) 21(209,178) 22(209,177.5) 23(209,177) 24(209,176.5) 25(209,176) 26(209,175.5) 27(209,175) 28(209,174.5) 29(216.1,174.5) 30(216.1,175) 31(216.1,175.5) 32(216.1,176) 33(216.1,176.5) 34(216.1,177) 35(216.1,177.5) 36(216.1,178) 37(216.1,178.5) 38(216.1,179) 39(216.1,179.5) 40(216.1,180) 41(216.1,180.5) 42(216.1,181) 43(216.1,181.5) 44(216.1,182) 45(216.1,182.5) 46(216.1,183) 47(216.1,183.5) 48(216.1,184) 49(216.1,184.5) 50(216.1,185) 51(216.1,185.5) 52(216.1,186) 53(216.1,186.5) 54(216.1,187) 55(216.1,187.5) 56(216.1,188)

## Nets
